# EAGLE board eeArm_Breakout_Panelized (EAGLE 7.3.0)
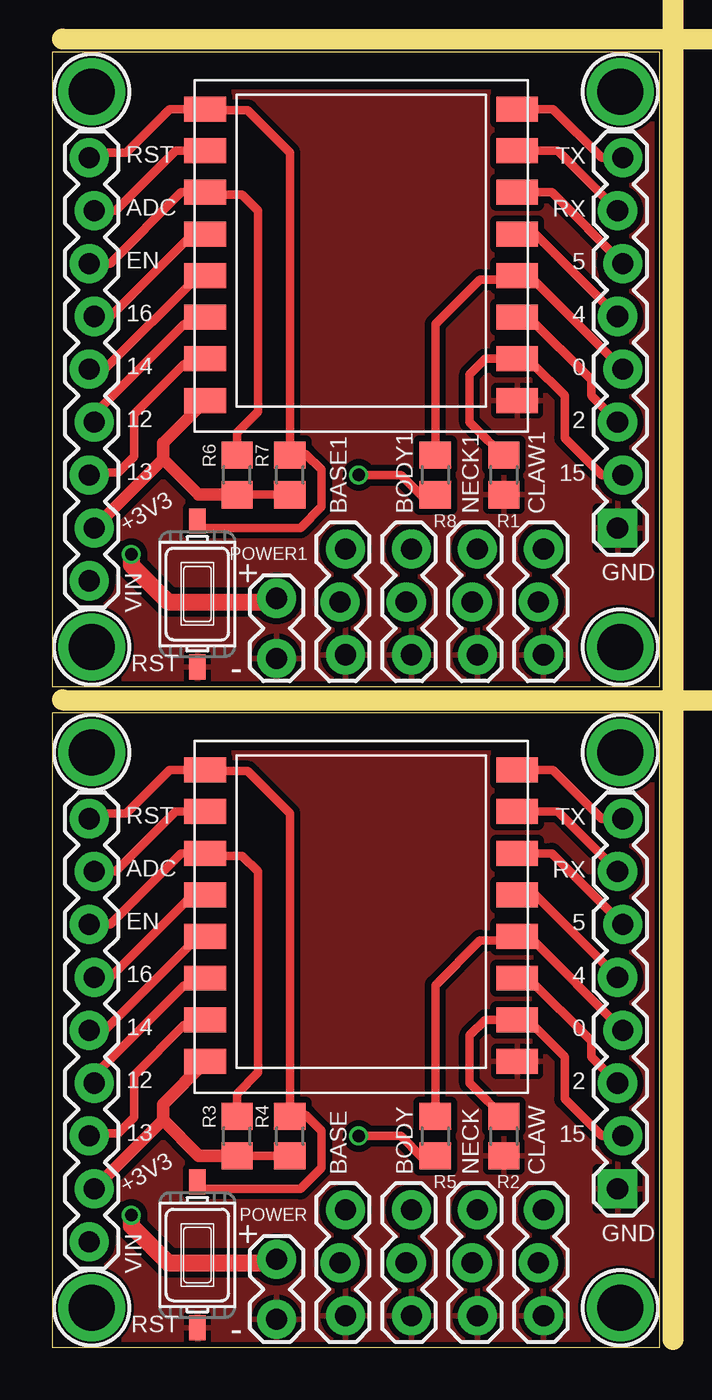
[diagram p0: board, top side]
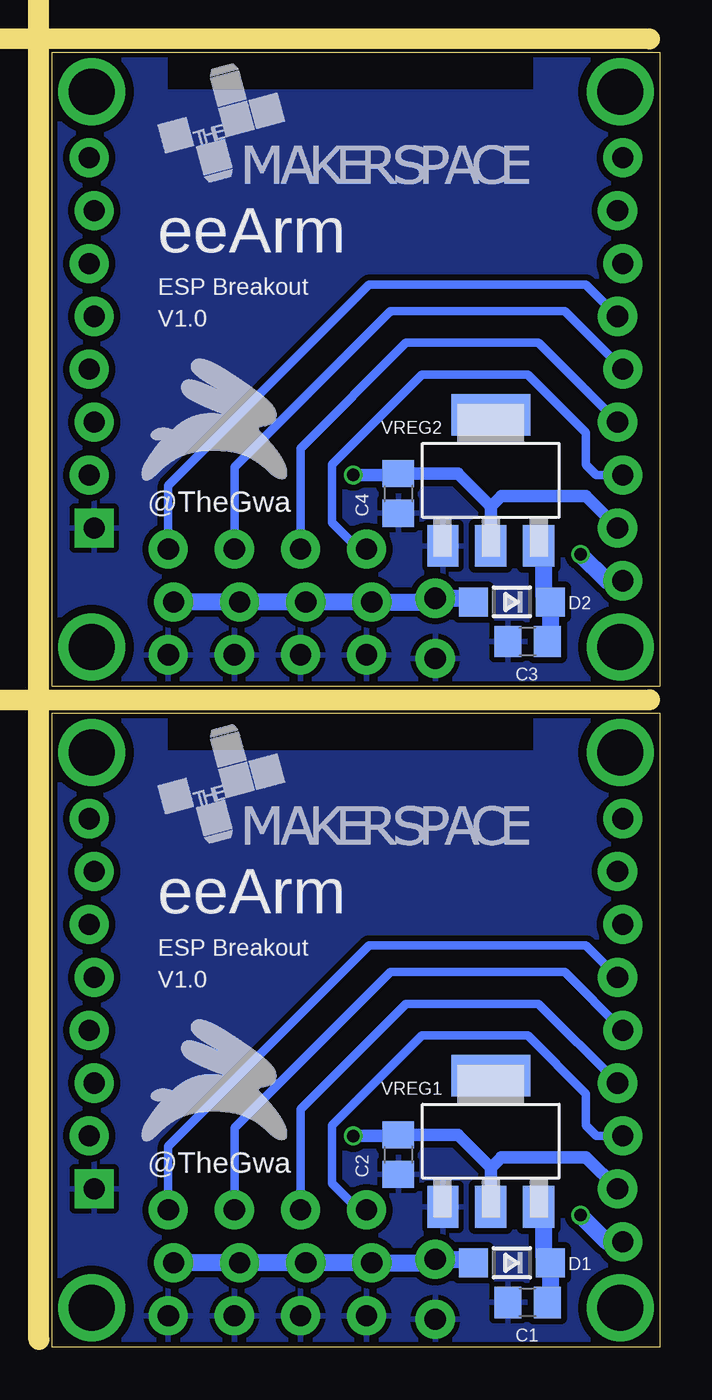
[diagram p1: board, bottom side, seen from below]

Size 29.21 x 62.23 mm. Coordinates in mm from the lower left corner, seen from the top.
Outline: 0,30.48 0,0 29.21,0 29.21,30.48 0,30.48
Outline: 0,62.23 0,31.75 29.21,31.75 29.21,62.23 0,62.23
Copper layers (1*16): Top 0.035mm / dielectric 1.5mm / Bottom 0.035mm
Design rules "dirt_cheap_dirty_boards.v1 *": minimum track width 5mil, minimum drill 12mil, track to track 12mil, track to pad 12mil, pad to pad 12mil, via to via 12mil, smd to smd 0mil, copper to edge 10mil, drill to drill 10mil, minimum pad ring 10mil, minimum via ring 6mil, stop-mask expansion 2mil, vias tented up to drill 25mil, thermal gap 10mil
tRestrict: area 6.1,28.7 to 23.6,30.5; area 6.1,60.5 to 23.6,62.2
bRestrict: area 6.1,28.7 to 23.6,30.5; area 6.1,60.5 to 23.6,62.2
Milling: 5 lines

## Footprints (pad centres in the part's own frame; a part is rotated, then mirrored left to right if it is on the bottom)
1X03_LOCK = drill 1.016 pad 1.88: 1 0,0.127; 2 2.54,-0.127; 3 5.08,0.127
C0805 = smd 1.3 x 1.5: 1 -0.95,0; 2 0.95,0
SOD-123 = smd 1.4 x 1.4: A 1.85,0; C -1.85,0
1X08_LOCK = drill 1.016 pad 1.88 square: 1 0,0.127 | drill 1.016 pad 1.88: 2 2.54,-0.127; 3 5.08,0.127; 4 7.62,-0.127; 5 10.16,0.127; 6 12.7,-0.127; 7 15.24,0.127; 8 17.78,-0.127
1X09_LOCK = drill 1.016 pad 1.88: 1 0,0.127; 2 2.54,-0.127; 3 5.08,0.127; 4 7.62,-0.127; 5 10.16,0.127; 6 12.7,-0.127; 7 15.24,0.127; 8 17.78,-0.127; 9 20.32,0.127
1X02_LOCK = drill 1.016 pad 1.88: 1 -0.178,0; 2 2.718,0
R0805 = smd 1.3 x 1.5: 1 -0.95,0; 2 0.95,0
SW_TACT_3X6 = smd 1.2 x 0.8: 1 -3.5,0; 2 3.5,0
MOUNTINGHOLE_2.0_PLATED = drill 2.2 pad 3: P$1 0,0
SOT-223 = smd 1.5 x 2: 1 -2.3,-3.15; 2 0,-3.15; 3 2.3,-3.15 | smd 3.8 x 2: 4 0,3.15
ESP-12-NOPLACE = smd 2 x 1.2: 1 -7.5,4.5; 2 -7.5,2.5; 3 -7.5,0.5; 4 -7.5,-1.5; 5 -7.5,-3.5; 6 -7.5,-5.5; 7 -7.5,-7.5; 8 -7.5,-9.5; 9 7.5,-9.5; 10 7.5,-7.5; 11 7.5,-5.5; 12 7.5,-3.5; 13 7.5,-1.5; 14 7.5,0.5; 15 7.5,2.5; 16 7.5,4.5

## Placement (x,y rotation side)
BASE  [1X03_LOCK]  13.97,6.6 270 top
BASE1  [1X03_LOCK]  13.97,38.35 270 top
BODY  [1X03_LOCK]  17.14,6.6 270 top
BODY1  [1X03_LOCK]  17.14,38.35 270 top
C1  100n  [C0805]  6.35,2.16 180 bottom
C2  10u  [C0805]  12.57,9.27 270 bottom
C3  100n  [C0805]  6.35,33.91 180 bottom
C4  10u  [C0805]  12.57,41.02 270 bottom
CLAW  [1X03_LOCK]  23.5,6.6 270 top
CLAW1  [1X03_LOCK]  23.5,38.35 270 top
D1  MBR120  [SOD-123]  7.11,4.06 180 bottom
D2  MBR120  [SOD-123]  7.11,35.81 180 bottom
E$1  [MAKERSPACE_LOGO]  24.13,24.13 0 bottom
E$2  [GWAJA-LOGO-PLACE]  24.89,9.91 0 bottom
E$3  [MAKERSPACE_LOGO]  24.13,55.88 0 bottom
E$4  [GWAJA-LOGO-PLACE]  24.89,41.66 0 bottom
JP1  J1  [1X08_LOCK]  27.3,39.37 90 top
JP2  J1  [1X08_LOCK]  27.3,7.62 90 top
JP3  [1X09_LOCK]  1.91,5.08 90 top
JP4  [1X09_LOCK]  1.91,36.83 90 top
NECK  [1X03_LOCK]  20.32,6.6 270 top
NECK1  [1X03_LOCK]  20.32,38.35 270 top
POWER  [1X02_LOCK]  10.79,4.06 270 top
POWER1  [1X02_LOCK]  10.79,35.81 270 top
R1  4K7  [R0805]  21.72,41.91 90 top
R2  4K7  [R0805]  21.72,10.16 90 top
R3  4K7  [R0805]  8.89,10.16 90 top
R4  4K7  [R0805]  11.43,10.16 90 top
R5  4K7  [R0805]  18.41,10.16 270 top
R6  4K7  [R0805]  8.89,41.91 90 top
R7  4K7  [R0805]  11.43,41.91 90 top
R8  4K7  [R0805]  18.41,41.91 270 top
RESET  SW_TACT_2P-3X6  [SW_TACT_3X6]  6.99,4.45 90 top
RESET1  SW_TACT_2P-3X6  [SW_TACT_3X6]  6.99,36.2 90 top
U$1  MOUNTINGHOLE2.0  [MOUNTINGHOLE_2.0_PLATED]  27.3,60.33 0 top
U$2  MOUNTINGHOLE2.0  [MOUNTINGHOLE_2.0_PLATED]  1.91,60.33 0 top
U$3  MOUNTINGHOLE2.0  [MOUNTINGHOLE_2.0_PLATED]  1.91,33.66 0 top
U$4  MOUNTINGHOLE2.0  [MOUNTINGHOLE_2.0_PLATED]  27.3,33.66 0 top
U$6  MOUNTINGHOLE2.0  [MOUNTINGHOLE_2.0_PLATED]  27.3,28.57 0 top
U$7  MOUNTINGHOLE2.0  [MOUNTINGHOLE_2.0_PLATED]  1.91,28.57 0 top
U$8  MOUNTINGHOLE2.0  [MOUNTINGHOLE_2.0_PLATED]  1.91,1.91 0 top
U$9  MOUNTINGHOLE2.0  [MOUNTINGHOLE_2.0_PLATED]  27.3,1.91 0 top
VREG1  LD1117  [SOT-223]  8.13,9.91 0 bottom
VREG2  LD1117  [SOT-223]  8.13,41.66 0 bottom
X1  ESP8266  [ESP-12-NOPLACE]  14.86,23.24 0 top
X2  ESP8266  [ESP-12-NOPLACE]  14.86,54.99 0 top

## Library data of the parts
BASE BASE1 BODY BODY1 CLAW CLAW1 JP1-JP4 NECK NECK1 POWER POWER1 = SparkFun-Connectors
C1-C4 R1-R8 = resistor
D1 D2 = microbuilder
E$1 E$3 RESET RESET1 X1 X2 = Gwa's Parts
E$2 E$4 = Gwaja-logo
U$1-U$4 U$6-U$9 = microbuilder; BOM: EXCLUDE
VREG1 VREG2 = dp_devices

## Nets
+3V1: C4.1 JP4.2 R6.1 R7.1 R8.2 VREG2.2 X2.8
+3V3: C2.1 JP3.2 R3.1 R4.1 R5.2 VREG1.2 X1.8
ADC: JP3.8 X1.2
ADC1: JP4.8 X2.2
BASE: BASE.1 JP3.3 X1.7
BASE1: BASE1.1 JP4.3 X2.7
BODY: BODY.1 JP3.4 X1.6
BODY1: BODY1.1 JP4.4 X2.6
CH_PD: JP3.7 R3.2 X1.3
CH_PD1: JP4.7 R6.2 X2.3
CLAW: CLAW.1 JP3.6 X1.4
CLAW1: CLAW1.1 JP4.6 X2.4
DTR: JP2.4 R5.1 X1.12
DTR1: JP1.4 R8.1 X2.12
GND: BASE.3 BODY.3 C1.2 C2.2 CLAW.3 JP2.1 NECK.3 POWER.2 R2.1 RESET.1 VREG1.1 X1.9
GND1: BASE1.3 BODY1.3 C3.2 C4.2 CLAW1.3 JP1.1 NECK1.3 POWER1.2 R1.1 RESET1.1 VREG2.1 X2.9
GPIO1: JP1.5 X2.13
GPIO2: JP2.3 X1.11
GPIO3: JP1.3 X2.11
GPIO4: JP2.6 X1.14
GPIO5: JP2.5 X1.13
GPIO6: JP1.6 X2.14
GPIO7: JP1.2 R1.2 X2.10
GPIO15: JP2.2 R2.2 X1.10
NECK: JP3.5 NECK.1 X1.5
NECK1: JP4.5 NECK1.1 X2.5
RESET: JP3.9 R4.2 RESET.2 X1.1
RESET1: JP4.9 R7.2 RESET1.2 X2.1
RX: JP2.7 X1.15
RX1: JP1.7 X2.15
TX: JP2.8 X1.16
TX1: JP1.8 X2.16
VBATT: BASE.2 BODY.2 CLAW.2 D1.A JP3.1 NECK.2 POWER.1
VBATT1: BASE1.2 BODY1.2 CLAW1.2 D2.A JP4.1 NECK1.2 POWER1.1
VIN: C1.1 D1.C VREG1.3
VIN1: C3.1 D2.C VREG2.3

## Tracks (layer width: path | path; a pad name or v marks a point on that pad's centre or on a via)
+3V1  (via drill 0.6)
  Top 0.406: 8.82,40.89 R6.1 R7.1 | X2.8 7.36,45.46 | v14.73,41.91 16.76,41.91 17.78,40.89 18.35,40.89 R8.2
  Top 0.61: 7.36,45.46 5.33,43.43 5.33,42.67 | 5.33,42.67 JP4.2 | 5.33,42.67 7.05,40.96 R6.1
  Bottom 0.406: C4.1 12.64,41.97 12.7,41.91
  Bottom 0.61: C4.1 9.71,41.97 8.13,40.39 | 8.13,40.39 VREG2.2 | JP4.2 3.56,40.89 7.62,40.89 8.13,40.39 | 12.7,41.91 v14.73,41.91
+3V3  (via drill 0.6)
  Top 0.406: 8.82,9.14 R3.1 R4.1 | X1.8 7.36,13.71 | v14.73,10.16 16.76,10.16 17.78,9.14 18.35,9.14 R5.2
  Top 0.61: 7.36,13.71 5.33,11.68 5.33,10.92 | 5.33,10.92 JP3.2 | 5.33,10.92 7.05,9.21 R3.1
  Bottom 0.406: C2.1 12.64,10.22 12.7,10.16
  Bottom 0.61: C2.1 9.71,10.22 8.13,8.64 | 8.13,8.64 VREG1.2 | JP3.2 3.56,9.14 7.62,9.14 8.13,8.64 | 12.7,10.16 v14.73,10.16
ADC
  Top 0.406: X1.2 5.93,25.74 3.05,22.86 JP3.8
ADC1
  Top 0.406: X2.2 5.93,57.49 3.05,54.61 JP4.8
BASE
  Top 0.406: X1.7 7.11,15.74 | 7.11,15.74 7.11,15.75 | JP3.3 1.91,10.29 3.17,10.29 3.94,11.05 3.94,13.08 6.35,15.49 6.86,15.49 7.11,15.74
  Bottom 0.406: JP3.3 3.05,10.16 3.56,10.67 3.56,12.19 6.35,14.99 11.43,14.99 15.75,10.67 15.75,7.87 14.48,6.6 BASE.1
BASE1
  Top 0.406: X2.7 7.11,47.49 | 7.11,47.49 7.11,47.5 | JP4.3 1.91,42.04 3.17,42.04 3.94,42.8 3.94,44.83 6.35,47.24 6.86,47.24 7.11,47.49
  Bottom 0.406: JP4.3 3.05,41.91 3.56,42.42 3.56,43.94 6.35,46.74 11.43,46.74 15.75,42.42 15.75,39.62 14.48,38.35 BASE1.1
BODY
  Top 0.406: X1.6 7.07,17.74 6.73,17.4 6.35,17.4 2.03,13.08 JP3.4
  Bottom 0.406: JP3.4 5.84,16.51 12.19,16.51 17.27,11.43 BODY.1
BODY1
  Top 0.406: X2.6 7.07,49.49 6.73,49.15 6.35,49.15 2.03,44.83 JP4.4
  Bottom 0.406: JP4.4 5.84,48.26 12.19,48.26 17.27,43.18 BODY1.1
CH_PD
  Top 0.406: JP3.7 2.79,20.32 6.21,23.74 X1.3 7.48,23.62 9.14,23.62 9.91,22.86 9.91,13.21 8.89,12.19 R3.2
CH_PD1
  Top 0.406: JP4.7 2.79,52.07 6.21,55.49 X2.3 7.48,55.37 9.14,55.37 9.91,54.61 9.91,44.96 8.89,43.94 R6.2
CLAW
  Top 0.406: X1.4 6.75,21.74 2.79,17.78 JP3.6
  Bottom 0.406: JP3.6 3.56,19.3 13.97,19.3 23.62,9.65 CLAW.1
CLAW1
  Top 0.406: X2.4 6.75,53.49 2.79,49.53 JP4.6
  Bottom 0.406: JP4.6 3.56,51.05 13.97,51.05 23.62,41.4 CLAW1.1
DTR
  Top 0.406: R5.1 18.41,17.4 20.57,19.56 22.18,19.56 X1.12 22.93,19.74 JP2.4
DTR1
  Top 0.406: R8.1 18.41,49.15 20.57,51.31 22.18,51.31 X2.12 22.93,51.49 JP1.4
GND
  pour Top: 0,30.48 0,0 29.21,0 29.21,30.48
  pour Bottom: 0,30.48 0,0 29.21,0 29.21,30.48
GND1
  pour Top: 0,62.23 0,31.75 29.21,31.75 29.21,62.23
  pour Bottom: 0,62.23 0,31.75 29.21,31.75 29.21,62.23
GPIO1
  Top 0.406: X2.13 23.22,53.49 JP1.5
GPIO2
  Top 0.406: X1.11 22.9,17.74 25.91,14.73 25.91,13.97 JP2.3
GPIO3
  Top 0.406: X2.11 22.9,49.49 25.91,46.48 25.91,45.72 JP1.3
GPIO4
  Top 0.406: X1.14 24.01,23.74 JP2.6
GPIO5
  Top 0.406: X1.13 23.22,21.74 JP2.5
GPIO6
  Top 0.406: X2.14 24.01,55.49 JP1.6
GPIO7
  Top 0.406: R1.2 20.95,43.56 20.07,44.45 20.07,46.74 20.83,47.5 X2.10 23.11,47.5 23.11,47.24 24.64,45.72 24.64,43.69 26.42,41.91 JP1.2
GPIO15
  Top 0.406: R2.2 20.95,11.81 20.07,12.7 20.07,14.99 20.83,15.75 X1.10 23.11,15.75 23.11,15.49 24.64,13.97 24.64,11.94 26.42,10.16 JP2.2
NECK
  Top 0.406: X1.5 7.04,19.74 2.54,15.24 JP3.5
  Bottom 0.406: JP3.5 4.57,18.03 12.95,18.03 20.45,10.54 NECK.1
NECK1
  Top 0.406: X2.5 7.04,51.49 2.54,46.99 JP4.5
  Bottom 0.406: JP4.5 4.57,49.78 12.95,49.78 20.45,42.29 NECK1.1
RESET
  Top 0.406: JP3.9 2.03,25.65 3.56,25.65 5.64,27.74 X1.1 7.41,27.69 9.4,27.69 11.43,25.65 R4.2 11.5,11.18 12.19,11.18 12.95,10.41 12.95,8.64 11.94,7.62 7.31,7.62 RESET.2
RESET1
  Top 0.406: JP4.9 2.03,57.4 3.56,57.4 5.64,59.49 X2.1 7.41,59.44 9.4,59.44 11.43,57.4 R7.2 11.5,42.93 12.19,42.93 12.95,42.16 12.95,40.39 11.94,39.37 7.31,39.37 RESET1.2
RX
  Top 0.406: X1.15 24.3,25.74 JP2.7
RX1
  Top 0.406: X2.15 24.3,57.49 JP1.7
TX
  Top 0.406: X1.16 24.07,27.74 26.42,25.4 JP2.8
TX1
  Top 0.406: X2.16 24.07,59.49 26.42,57.15 JP1.8
VBATT  (via drill 0.6)
  Top 0.813: v3.81,6.35 3.81,5.84 5.59,4.06 10.62,4.06 POWER.1
  Bottom 0.406: 10.97,4.06 POWER.1 | 9.14,4.24 D1.A
  Bottom 0.813: CLAW.2 NECK.2 BODY.2 BASE.2 10.97,4.06 | POWER.1 9.14,4.24 | JP3.1 2.54,5.08 v3.81,6.35
VBATT1  (via drill 0.6)
  Top 0.813: v3.81,38.1 3.81,37.59 5.59,35.81 10.62,35.81 POWER1.1
  Bottom 0.406: 10.97,35.81 POWER1.1 | 9.14,35.99 D2.A
  Bottom 0.813: CLAW1.2 NECK1.2 BODY1.2 BASE1.2 10.97,35.81 | POWER1.1 9.14,35.99 | JP4.1 2.54,36.83 v3.81,38.1
VIN
  Bottom 0.406: 5.59,4.06 D1.C 5.59,4.39 | 5.59,6.52 VREG1.3 | 5.26,2.3 C1.1
  Bottom 0.813: 5.59,6.52 5.59,4.39 | D1.C 5.26,2.3
VIN1
  Bottom 0.406: 5.59,35.81 D2.C 5.59,36.14 | 5.59,38.27 VREG2.3 | 5.26,34.05 C3.1
  Bottom 0.813: 5.59,38.27 5.59,36.14 | D2.C 5.26,34.05

## Text on the board
tPlace: TX | RST | RX | ADC | 5 | EN | 4 | 16 | 14 | 0 | 2 | 12 | 13 | 15 | +3V3 | + | GND | VIN | RST | - | TX | RST | ADC | RX | 5 | EN | 16 | 4 | 0 | 14 | 2 | 12 | 15 | 13 | +3V3 | + | GND | VIN | RST | -
bPlace: eeArm | ESP Breakout | V1.0 | @TheGwa | eeArm | ESP Breakout | V1.0 | @TheGwa